# Altium PCB PCB1.PcbDoc
Units mm, origin at the board's own origin, x right, y up, seen from the top; angles counter-clockwise.
Board outline 51 x 51 mm, 2 copper layers (Top Layer, Bottom Layer), stack 1.57 mm thick; 77 components, 49 nets, 304 pads, 1 vias.
Unrouted connection lines stored in the file: 196.
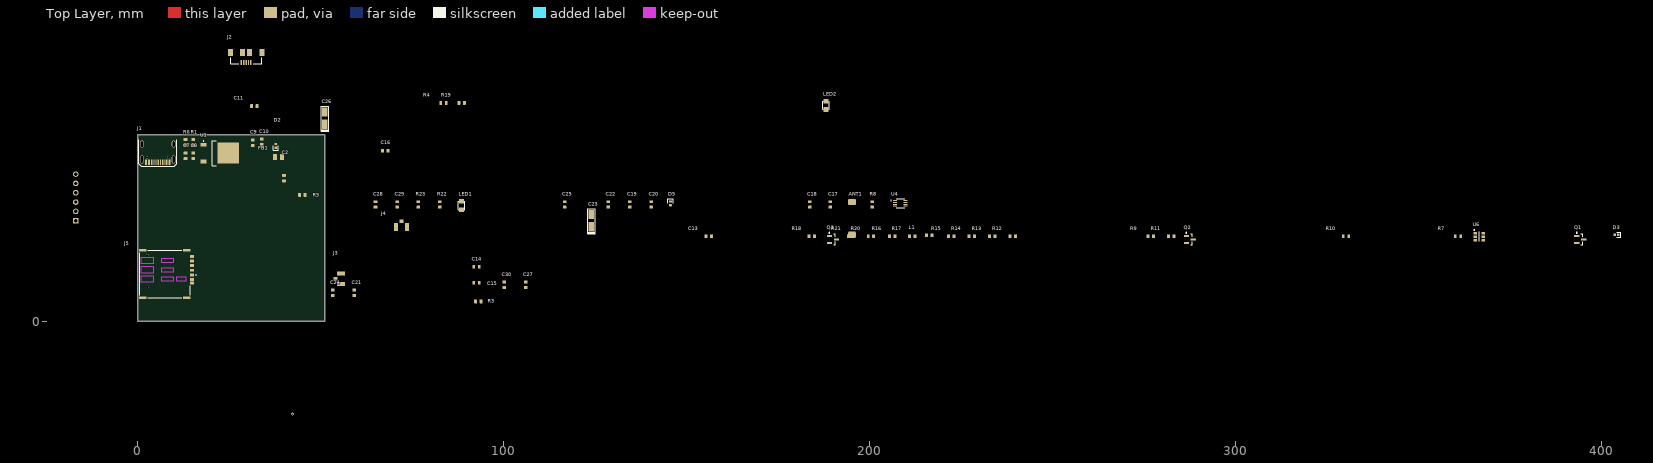
[diagram p0: Top Layer view]
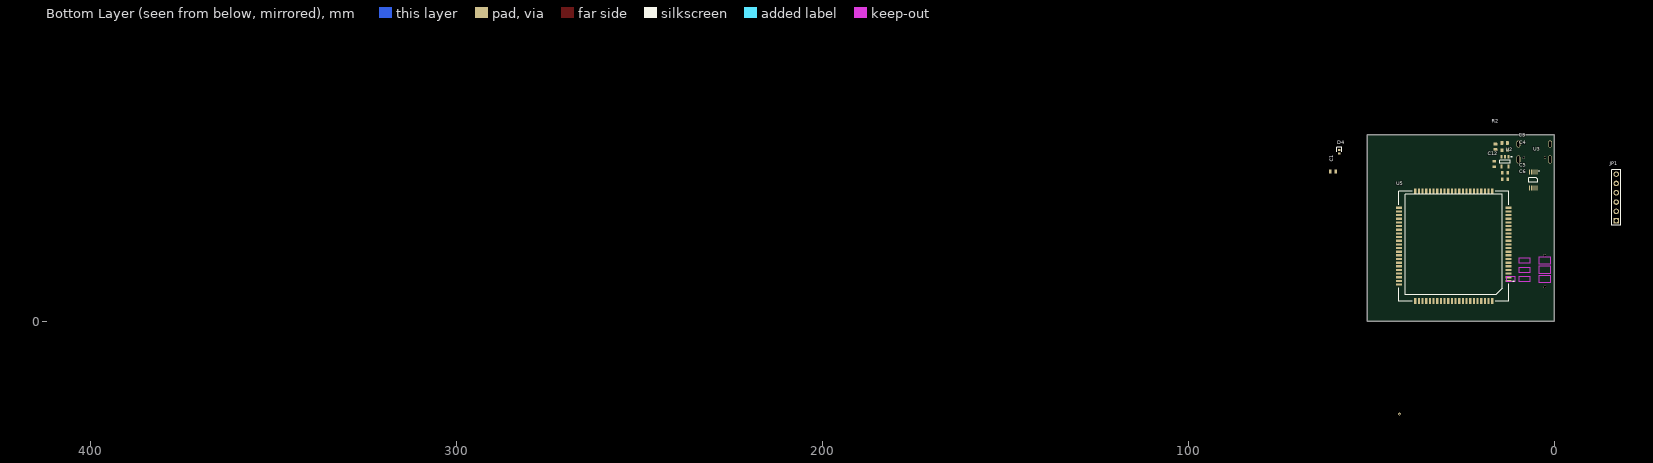
[diagram p1: Bottom Layer view, seen from below]

## Layer stack, top to bottom
Top Solder: solder mask 0.02, Solder Resist, Dk 3.5
Top Layer: signal copper 0.035
Dielectric 1: dielectric 1.5, FR-4, Dk 4.8
Bottom Layer: signal copper 0.035
Bottom Solder: solder mask 0.02, Solder Resist, Dk 3.5

## Board outline
0,0 51,0 51,51 0,51

## Design rules (kind name [scope] priority, off if disabled: settings)
AssemblyTestPointUsage [All] p1: valid=2
AssemblyTestpoint [All] p1: testpointundercomponent=TRUE minsize=1.016 maxsize=2.54 preferedsize=1.524 minholesize=0 maxholesize=1.016 preferedholesize=0.813 testpointgrid=0.025 usegrid=FALSE gridtolerance=0 allowsidetop=TRUE allowsidebottom=TRUE
BoardOutlineClearance [All] p1: gap=0.254 ignorepadtopadclearanceinfootprint=FALSE except(0: Arc-SplitContinuation Track-SplitContinuation SMDPad-SplitContinuation THPad-SplitContinuation Via-SplitContinuation Fill-SplitContinuation Poly-SplitContinuation Region-SplitContinuation Text-SplitContinuation)
Clearance BREAKOUT [WithinRoom('CPU_10')or WithinRoom('CPU_11')or WithinRoom('CPU_12')or WithinRoom('CPU_13')or WithinRoom('CPU_15')or WithinRoom('CPU_16') or WithinRoom('CPU_17')or WithinRoom('CPU_4')or WithinRoom('CPU_7')or WithinRoom('CPU_8') or WithinRoom('CPU_9') or WithinRoom('CPU_3')or WithinRoom('CPU_5')or WithinRoom('CPU1')or WithinRoom('CPU2')] p1: gap=0.076 ignorepadtopadclearanceinfootprint=TRUE except(0.08: SMDPad-Fill SMDPad-Text SMDPad-Hole; 0.102: SMDPad-SMDPad SMDPad-THPad THPad-THPad; 0.114: Arc-Poly Track-SMDPad Track-THPad Track-Fill Track-Poly SMDPad-Via SMDPad-Poly SMDPad-Region THPad-Via THPad-Fill THPad-Poly THPad-Region THPad-Text THPad-Hole Via-Via Via-Region Fill-Poly Poly-Poly Poly-Region Poly-Text Poly-Hole; 0.117: Via-Fill Via-Poly)
Clearance GND_SGND [InNet('ETH1_GND')OR InNet('ETH2_GND') OR InNet('ETH3_GND')OR InNet('ETH4_GND') or InNet('RT_ETH_GND') vs InNet('GND')] p2: gap=0.6 ignorepadtopadclearanceinfootprint=TRUE
Clearance 50Ohm_GND_INNER [OnMid and (InNetClass('50SE') OR InNetClass('RGMII_50SE') OR InNetClass('SDCARD_50ohm')) vs InNet('GND')] p3: gap=0.102 ignorepadtopadclearanceinfootprint=TRUE
Clearance PCIe_85_GND_INNER [InNetClass('PCIE') And  OnMid vs InNet('GND')] p4: gap=0.152 ignorepadtopadclearanceinfootprint=TRUE
Clearance USB_90_GND_INNER [(InNetClass('USB_HS') OR InNetClass('USB_SS')) And  OnMid vs InNet('GND')] p5: gap=0.178 ignorepadtopadclearanceinfootprint=TRUE
Clearance ETH100_GND_INNER [OnMid and InNetClass('Ethernet') vs InNet('GND') or InNet('ETH1_GND')  or InNet('ETH2_GND') or InNet('ETH3_GND') or InNet('ETH4_GND') or InNet('RT_ETH_GND')] p6: gap=0.203 ignorepadtopadclearanceinfootprint=TRUE
Clearance 50Ohm_GND [InNetClass('50SE') OR InNetClass('RGMII_50SE') OR InNetClass('SDCARD_50ohm') vs InNet('GND')] p7: gap=0.127 ignorepadtopadclearanceinfootprint=TRUE
Clearance PCIe_85_GND [InNetClass('PCIE') vs InNet('GND')] p8: gap=0.203 ignorepadtopadclearanceinfootprint=TRUE
Clearance USB_90_GND [InNetClass('USB_HS') OR InNetClass('USB_SS') vs InNet('GND')] p9: gap=0.203 ignorepadtopadclearanceinfootprint=TRUE
Clearance ETH100_GND [InNetClass('Ethernet') vs InNet('GND') or InNet('ETH1_GND')  or InNet('ETH2_GND') or InNet('ETH3_GND') or InNet('ETH4_GND') or InNet('RT_ETH_GND')] p10: gap=0.203 ignorepadtopadclearanceinfootprint=FALSE
Clearance 50Ohm_OTHER_INNER [OnMid and (InNetClass('50SE') OR InNetClass('RGMII_50SE') OR InNetClass('SDCARD_50ohm'))] p11: gap=0.203 ignorepadtopadclearanceinfootprint=TRUE
Clearance PCIe_85_PCIe_85_INNER [InNetClass('PCIE') And  OnMid] p12: gap=0.239 ignorepadtopadclearanceinfootprint=TRUE
Clearance PCIe_85_OTHER_INNER [InNetClass('PCIE') And  OnMid vs Not InNetClass('PCIE')] p13: gap=0.239 ignorepadtopadclearanceinfootprint=TRUE
Clearance USB_90_USB90_INNER [(InNetClass('USB_HS') OR InNetClass('USB_SS')) And  OnMid] p14: gap=0.203 ignorepadtopadclearanceinfootprint=TRUE
Clearance USB_90_OTHER_INNER [(InNetClass('USB_HS') OR InNetClass('USB_SS')) And  OnMid vs Not (InNetClass('USB_HS') OR InNetClass('USB_SS'))] p15: gap=0.203 ignorepadtopadclearanceinfootprint=TRUE
Clearance ETH100_ETH100_INNER [InNetClass('Ethernet') And  OnMid] p16: gap=0.386 ignorepadtopadclearanceinfootprint=TRUE
Clearance ETH100_OTHER_INNER [InNetClass('Ethernet') And  OnMid vs Not InNetClass('Ethernet')] p17: gap=0.386 ignorepadtopadclearanceinfootprint=TRUE
Clearance 50Ohm_OTHER [InNetClass('50SE') OR InNetClass('RGMII_50SE') OR InNetClass('SDCARD_50ohm')] p18: gap=0.345 ignorepadtopadclearanceinfootprint=TRUE
Clearance PCIe_PCIe_85 [InNetClass('PCIE')] p19: gap=0.406 ignorepadtopadclearanceinfootprint=TRUE
Clearance PCIe_85_OTHER [InNetClass('PCIE') vs Not InNetClass('PCIE')] p20: gap=0.406 ignorepadtopadclearanceinfootprint=TRUE
Clearance USB_90_USB90 [InNetClass('USB_HS') OR InNetClass('USB_SS')] p21: gap=0.356 ignorepadtopadclearanceinfootprint=TRUE
Clearance USB_90_OTHER [InNetClass('USB_HS') OR InNetClass('USB_SS') vs Not (InNetClass('USB_HS') OR InNetClass('USB_SS'))] p22: gap=0.356 ignorepadtopadclearanceinfootprint=TRUE
Clearance ETH100_ETH100 [InNetClass('Ethernet')] p23: gap=0.559 ignorepadtopadclearanceinfootprint=TRUE
Clearance ETH100_OTHER [InNetClass('Ethernet') vs Not InNetClass('Ethernet')] p24: gap=0.559 ignorepadtopadclearanceinfootprint=TRUE
Clearance Default [All] p25: gap=0.254 ignorepadtopadclearanceinfootprint=TRUE except(0.279: Region-Region)
ComponentClearance [All] p1: gap=0.3 collisioncheckmode=3 verticalgap=0 showdistances=FALSE donotcheckwithout3dbody=TRUE checkcomponentboundary=TRUE
DiffPairsRouting BREAKOUT_2 [WithinRoom('CPU') or WithinRoom('CPU_1') or WithinRoom('CPU_2') or WithinRoom('CPU_4')or WithinRoom('CPU_6')or WithinRoom('CPU_7')or WithinRoom('CPU_8')or WithinRoom('CPU_9')or WithinRoom('CPU_10')or WithinRoom('CPU_11')or WithinRoom('CPU_12')or WithinRoom('CPU_13')or WithinRoom('CPU_14')or WithinRoom('CPU_15')or WithinRoom('CPU_16')] p1: maxlimit=0.076 minlimit=0.076 mostfreqgap=0.076 toplayer_minwidth=0.076 toplayer_maxwidth=0.203 toplayer_prefwidth=0.076 bottomlayer_minwidth=0.076 bottomlayer_maxwidth=0.203 bottomlayer_prefwidth=0.076 maxuncoupledlength=12.7
DiffPairsRouting 100_OHM_DIFF [InDifferentialPairClass('ETH0_100Diff')] p2: maxlimit=0.152 minlimit=0.152 mostfreqgap=0.152 toplayer_minwidth=0.14 toplayer_maxwidth=0.14 toplayer_prefwidth=0.14 bottomlayer_minwidth=0.14 bottomlayer_maxwidth=0.14 bottomlayer_prefwidth=0.14 maxuncoupledlength=12.7
DiffPairsRouting 90_OHM_DIFF [InDifferentialPairClass('USB_HS_90diff') OR InDifferentialPairClass('USB_sS_90diff')] p3: maxlimit=0.152 minlimit=0.152 mostfreqgap=0.152 toplayer_minwidth=0.178 toplayer_maxwidth=0.178 toplayer_prefwidth=0.178 bottomlayer_minwidth=0.178 bottomlayer_maxwidth=0.178 bottomlayer_prefwidth=0.178 maxuncoupledlength=12.7
DiffPairsRouting 85_OHM_DIFF [InDifferentialPairClass('PCIE_85Diff')] p4: maxlimit=0.152 minlimit=0.152 mostfreqgap=0.152 toplayer_minwidth=0.203 toplayer_maxwidth=0.203 toplayer_prefwidth=0.203 bottomlayer_minwidth=0.203 bottomlayer_maxwidth=0.203 bottomlayer_prefwidth=0.203 maxuncoupledlength=12.7
FabricationTestPointUsage [All] p1: valid=2 allowmultiple=FALSE
FabricationTestpoint [All] p1: side=3 testpointundercomponent=TRUE minsize=0.762 maxsize=2.54 preferedsize=1.524 minholesize=0 maxholesize=1.016 preferedholesize=0.813 testpointgrid=0.025 allowsidetop=TRUE allowsidebottom=TRUE usegrid=FALSE gridtolerance=0
MatchedLengths DiffPair_MatchedLengths [(InNetClass('DDR_100_OHM') or InNetClass('USB2D0') or InNetClass('USBWIFI'))] p1: tolerance=0.3 checknetsindiffpair=TRUE checkdiffpairvsdiffpair=FALSE checkxsignals=FALSE checkothers=FALSE
MinimumSolderMaskSliver [All] p1: minsoldermaskwidth=0.08
PlaneConnect [All] p1: planeconnectstyle=Direct reliefexpansion=0.508 reliefentries=4 reliefconductorwidth=0.254 reliefairgap=0.254
PolygonConnect PolygonConnect_1 [IsNamedPolygon('+12V') OR IsNamedPolygon('VCC')] p1: thpad.connectstyle=Relief thpad.reliefconductorwidth=0.8 thpad.reliefentries=4 thpad.polygonreliefangle="90 Angle" thpad.airgapwidth=0.3 smdpad.connectstyle=Relief smdpad.reliefconductorwidth=0.8 smdpad.reliefentries=4 smdpad.polygonreliefangle="90 Angle" smdpad.airgapwidth=0.3 via.connectstyle=Direct via.reliefconductorwidth=0.8 via.reliefentries=4 via.polygonreliefangle="90 Angle" via.airgapwidth=0.3
PolygonConnect [IsNamedPolygon('GND')] p2: connectstyle=Direct reliefconductorwidth=0.254 reliefentries=4 polygonreliefangle="90 Angle" airgapwidth=0.254
RoutingVias [All] p1: holewidth=0.711 width=1.27 viastyle="Through Hole" minholewidth=0.711 minwidth=1.27 maxholewidth=0.711 maxwidth=1.27 useviatemplates=TRUE viatemplateguid#1={6FAFDE06-7B93-419E-838A-A36D30FBA691} viatemplatename#1=v80h40m0mx0
RoutingVias Via550 [All] p2: holewidth=0.25 width=0.55 viastyle="Through Hole" minholewidth=0.25 minwidth=0.55 maxholewidth=0.25 maxwidth=0.55
SilkToSilkClearance [All] p1: silktosilkclearance=0.2
SilkToSolderMaskClearance [IsPad] p1: minsilkscreentomaskgap=0.01 clearancetoexposedcopper=TRUE
SolderMaskExpansion [IsVia] p1: expansion=0.1 istentingtop=TRUE soldermaskfromhole=TRUE
ViasUnderSMD [All] p1: allowed=FALSE
Width BREAKOUT_1 [WithinRoom('CPU') or WithinRoom('CPU_1') or WithinRoom('CPU_2') or WithinRoom('CPU_3') or WithinRoom('CPU_4') or WithinRoom('CPU_5')or WithinRoom('CPU_6')or WithinRoom('CPU_7')or WithinRoom('CPU_8')or WithinRoom('CPU_9')or WithinRoom('CPU_10')or WithinRoom('CPU_11')or WithinRoom('CPU_12')or WithinRoom('CPU_13')or WithinRoom('CPU_14')or WithinRoom('CPU_15')or WithinRoom('CPU_16')] p1: maxlimit=0.6 minlimit=0.089 preferedwidth=0.15 minimp=50.000000 maximp=50.000000 favimp=50.000000
Width 50_OHM [(InNetClass('50SE') Or InNetClass('RGMII_50SE') or InNetClass('SDCARD_50ohm'))] p2: maxlimit=0.2 minlimit=0.076 preferedwidth=0.173 bottomlayer_maxwidth=0.173 minimp=50.000000 maximp=50.000000 favimp=50.000000
Width [All] p3: maxlimit=10 minlimit=0.254 preferedwidth=0.254
20 further rules are at their usual default settings.

## Components (designator, comment, footprint, x,y, rotation, side; value= is the part's Value field where it differs from the comment)
ANT1 "ANT MAIN" AMCA92-2R660G-S1F-T 195.1,28.1 r90 top
C1 "100nF" CAP_0603 60.4,40.9 r180 bottom
C2 "100nF" CAP_0603 39.9,39.1 r270 top
C3 "10uF" CAP_0603 13.5,48.7 r0 bottom
C4 "1uF" CAP_0603 13.45,46.7 r0 bottom
C5 "1uF" CAP_0603 13.4,40.6 r0 bottom
C6 "100nF" CAP_0603 13.4,38.8 r0 bottom
C7 "10uF" CAP_0603 13,45.2 r90 top
C8 "0.1uF" CAP_0603 15.1,45.2 r90 top
C9 "22pF" CAP_0603 31.4,48.8 r90 top
C10 "0.1uF" CAP_0603 33.8,49 r90 top
C11 "1uF" CAP_0603 31.8,58.8 r0 top
C12 "22nF" CAP_0603 16.3,42.95 r90 bottom
C13 "100nF" CAP_0603 155.956,23.241 r0 top
C14 "100nF" CAP_0603 92.5,14.9 r180 top
C15 "33pF" CAP_0603 92.5,10.5 r0 top
C16 "C0603" CAP_0603 67.6,46.6 r180 top
C17 "22pF" CAP_0603 189.2,31.9 r90 top
C18 "C0603" CAP_0603 183.6,31.9 r90 top
C19 "C0603" CAP_0603 134.4,31.9 r90 top
C20 "C0603" CAP_0603 140.2,31.9 r90 top
C21 "1uF" CAP_0603 59.1,7.8 r90 top
C22 "100nF" CAP_0603 128.5,31.9 r90 top
C23 "100uF/10V" "tu tantalum smd3216" 123.9,27.5 r90 top
C24 "1uF" CAP_0603 53.2,7.8 r90 top
C25 "100nF" CAP_0603 116.6,31.9 r90 top
C26 "100uF/10V" "tu tantalum smd3216" 51.1,55.5 r90 top
C27 "22pF" CAP_0603 106,10 r90 top
C28 "22pF" CAP_0603 64.9,31.9 r90 top
C29 "22pF" CAP_0603 70.8,31.9 r90 top
C30 "100uF" CAP_0603 100.1,10 r90 top
D2 "D_TVS_0402" D_0402 37.6,47.9 r270 top
D3 "D_TVS_0402" D_0402 403.987,23.622 r0 top
D4 "D_TVS_0402" D_0402 58.7,46.3 r90 bottom
D5 "D_TVS_0402" D_0402 145.5,32.2 r90 top
FB1 "FB0805" FB_0805 38.4,44.9 r0 top
J1 "TYPE-C-31-M-12" TYPE-C-31-M-12 5.4,46.3 r180 top
J2 "USB3100-30-A" USB3100-30-A 29.55,72.787 r180 top
J3 "U.FL-R-SMT-1(60)" U.FL-R-SMT-1(60) 55.5,11.6 r270 top
J4 "U.FL-R-SMT-1(60)" U.FL-R-SMT-1(60) 72,25.8 r180 top
J5 "SIM8066-6-1-14-01-A_REVA" GCT_SIM8066-6-1-14-01-A_REVA 7.4,12.9 r270 top
JP1 "JP 1x6 2.54" HDR1X6 -17,27.48 r90 bottom
L1 "47nH" IND_0603 216.154,23.495 r0 top
LED1 "red" LED-0805-Red 88.4,30.5 r90 top
LED2 "red" LED-0805-Red 187.998,57.863 r90 top
Q1 "NPN-SOT23" "SOT23 - 3PIN" 394.081,22.352 r0 top
Q2 "NPN-SOT23" "SOT23 - 3PIN" 287.401,22.352 r0 top
Q3 "NPN-SOT23" "SOT23 - 3PIN" 189.865,22.352 r0 top
R1 "10K" RES_0603 15.1,48.9 r90 top
R2 "10K" RES_0603 16,47.65 r270 bottom
R3 "0" RES_0603 93,5.4 r180 top
R4 "0" RES_0603 83.477,59.641 r0 top
R5 "4.7K" RES_0603 44.9,34.5 r180 top
R6 "4.7K" RES_0603 13,48.9 r90 top
R7 "10K" RES_0603 360.68,23.241 r0 top
R8 "10R" RES_0603 200.6,31.9 r90 top
R9 "0" RES_0603 276.733,23.241 r0 top
R10 "0" RES_0603 330.073,23.241 r0 top
R11 "0" RES_0603 282.321,23.241 r0 top
R12 "1K" RES_0603 239.014,23.241 r0 top
R13 "1K" RES_0603 233.426,23.241 r0 top
R14 "10K" RES_0603 227.838,23.241 r0 top
R15 "10K" RES_0603 222.25,23.241 r0 top
R16 "10K" RES_0603 206.121,23.241 r0 top
R17 "1K" RES_0603 211.582,23.241 r0 top
R18 "10K" RES_0603 184.15,23.241 r0 top
R19 "22R" RES_0603 88.43,59.641 r0 top
R20 "22R" RES_0603 200.279,23.241 r0 top
R21 "470R" RES_0603 194.945,23.241 r0 top
R22 "22R" RES_0603 82.5,31.9 r90 top
R23 "470R" RES_0603 76.6,31.9 r90 top
U1 "AZ1084CD-ADJTRG1" "TO252 DPAK" 22.35,45.92 r0 top
U2 "RT9193-ADJ" SOT-23-5 13.4,43.6 r270 bottom
U3 "CH340E" MSOP-10 5.7,38.6 r270 bottom
U4 "TXB0102DCUR" txb0102 208.3,32.2 r0 top
U5 "SIM760x" "SIM7600CE - duplicate" 27.4,20.5 r0 bottom
U6 "TPD4E001" TSOT-26-6 366.522,23.114 r0 top

## Footprints (in the part's own frame and the unit in brackets; to place one, negate y for a bottom-side part, rotate by r counter-clockwise, add the part's x,y. Pads: shape width x height; smd on the part's side, far side on the other; paste and mask are expansions set on the pad)
AMCA92-2R660G-S1F-T [mm]
  rrect50% 1.7x2.2 smd: 1(-4.45,0) 2(4.45,0)
  body extent -4,-0.5 4,0.5, height 1
CAP_0603 [mm]
  rrect25% 0.8x1 smd: 1(-0.75,0) 2(0.75,0)
  body extent -0.8,-0.4 0.8,0.4, height 0.51
D_0402 [mm]
  rrect25% 0.6x0.7 smd: A(-0.5,0) K(0.5,0)
  silkscreen extent 0,-0.7 1.2,0.7, body extent -0.5,-0.25 0.5,0.25, height 0.51
FB_0805 [mm]
  rrect25% 1x1.7 smd: 1(-0.95,0) 2(0.95,0)
  body extent -1,-0.63 1,0.63, height 0.86
GCT_SIM8066-6-1-14-01-A_REVA [mm]
  rect 0.8x1.14 smd: C1(0.25,7.37) C2(-2.29,7.37) C3(-4.83,7.37) C5(1.52,7.37) C6(-1.02,7.37) C7(-3.56,7.37) CD(2.47,7.37)
  rect 0.7x2.1 smd: G1(-6.5,5.89) G2(6.5,5.89) G3(-6.5,-6.11) G4(6.5,-6.11)
  round 0.75 hole 0.75 unplated: ""(-5,-4.86) ""(3.5,-4.86)
  Keep-Out Layer region: 2,3.135 0.8,3.135 0.8,5.685 2,5.685
  Keep-Out Layer region: -0.255,-6.56 -2.105,-6.56 -2.105,-3.16 -0.255,-3.16
  Keep-Out Layer region: -2.795,-6.56 -4.645,-6.56 -4.645,-3.16 -2.795,-3.16
  Keep-Out Layer region: 2.285,-6.56 0.435,-6.56 0.435,-3.16 2.285,-3.16
  Keep-Out Layer region: 2,-0.915 0.8,-0.915 0.8,2.295 2,2.295
  Keep-Out Layer region: -0.54,-0.915 -1.74,-0.915 -1.74,2.295 -0.54,2.295
  Keep-Out Layer region: -3.08,-0.915 -4.28,-0.915 -4.28,2.295 -3.08,2.295
  silkscreen extent -6.55,-6.86 6.55,8.59, body extent -6.6,-7.09 6.49,7.47, height 1.5
HDR1X6 [mm] "Connector; Header; 6 Position"
  rect 1.5x1.5 hole 0.9: 1(0,0)
  round 1.5 hole 0.9: 2(2.54,0) 3(5.08,0) 4(7.62,0) 5(10.16,0) 6(12.7,0)
  silkscreen extent -1.27,-1.27 13.97,1.27, body extent -1.27,-1.27 13.97,1.27, height 7
IND_0603 [mm]
  rrect25% 0.8x1 smd: 1(-0.75,0) 2(0.75,0)
  body extent -0.81,-0.37 0.81,0.37, height 0.87
LED-0805-Red [mil]
  rect 50x55 smd: 1(0,0) 2(90,0)
  silkscreen extent 0,-35 90,35, body extent 5,-25 85,25, height 43
MSOP-10 [mm]
  rrect25% 1.4x0.3 smd mask+0.05: 1(-2.2,1) 2(-2.2,0.5) 3(-2.2,0) 4(-2.2,-0.5) 5(-2.2,-1) 6(2.2,-1) 7(2.2,-0.5) 8(2.2,0) 9(2.2,0.5) 10(2.2,1)
  silkscreen extent -2.57,-1.25 0.67,1.7, body extent -2.45,-1.5 2.45,1.5, height 1.15
RES_0603 [mm]
  rrect25% 0.8x1 smd: 1(-0.75,0) 2(0.75,0)
  body extent -0.8,-0.43 0.8,0.43, height 0.52
"SIM7600CE - duplicate" [mm]
  rect 1.6x0.6 smd: 1(-15,9.5) 2(-15,8.5) 3(-15,7.5) 4(-15,6.5) 5(-15,5.5) 6(-15,4.5) 7(-15,3.5) 8(-15,2.5) 9(-15,1.5) 10(-15,0.5) 11(-15,-0.5) 12(-15,-1.5) 13(-15,-2.5) 14(-15,-3.5) 15(-15,-4.5) 16(-15,-5.5) 17(-15,-6.5) 18(-15,-7.5) 19(-15,-8.5) 20(-15,-9.5) 41(15,-9.5) 42(15,-8.5) 43(15,-7.5) 44(15,-6.5) 45(15,-5.5) 46(15,-4.5) 47(15,-3.5) 48(15,-2.5) 49(15,-1.5) 50(15,-0.5) 51(15,0.5) 52(15,1.5) 53(15,2.5) 54(15,3.5) 55(15,4.5) 56(15,5.5) 57(15,6.5) 58(15,7.5) 59(15,8.5) 60(15,9.5) 81(-15,-10.5) 82(15,-10.5) 85(15,10.5)
  rect 0.6x1.6 smd: 21(-9.5,-15) 22(-8.5,-15) 23(-7.5,-15) 24(-6.5,-15) 25(-5.5,-15) 26(-4.5,-15) 27(-3.5,-15) 28(-2.5,-15) 29(-1.5,-15) 30(-0.5,-15) 31(0.5,-15) 32(1.5,-15) 33(2.5,-15) 34(3.5,-15) 35(4.5,-15) 36(5.5,-15) 37(6.5,-15) 38(7.5,-15) 39(8.5,-15) 40(9.5,-15) 61(9.5,15) 62(8.5,15) 63(7.5,15) 64(6.5,15) 65(5.5,15) 66(4.5,15) 67(3.5,15) 68(2.5,15) 69(1.5,15) 70(0.5,15) 71(-0.5,15) 72(-1.5,15) 73(-2.5,15) 74(-3.5,15) 75(-4.5,15) 76(-5.5,15) 77(-6.5,15) 78(-7.5,15) 79(-8.5,15) 80(-9.5,15) 83(10.5,-15) 84(-10.5,-15) 86(-10.5,15) 87(10.5,15)
  silkscreen extent -16.43,-15 15,15, body extent -15,-15.01 15.02,15.01, height 2.82
"SOT23 - 3PIN" [mm]
  rect 1.4x0.6 smd: 1(-0.95,0.95) 2(-0.95,-0.95) 3(0.95,0)
  silkscreen extent -1.07,-1.5 0.7,1.92, body extent -1.4,-1.45 1.4,1.45, height 1.29
SOT-23-5 [mm] "SOT23, 5-Leads, Body 2,90x2,80mm, Pitch 0,95mm, IPC Medium Density"
  rrect25% 1.05x0.6 smd: 1(-1.325,0.95) 2(-1.325,0) 3(-1.325,-0.95) 4(1.325,-0.95) 5(1.325,0.95)
  silkscreen extent -1.45,-1.45 0.4,1.92, body extent -1.4,-1.45 1.4,1.45, height 1.45
"TO252 DPAK" [mm] "D-PAK, 3-Pads, Body 6.3x6.8mm (max), IPC Medium Density"
  rect 1.6x1 smd: 1(-4.45,2.28) 3(-4.45,-2.28)
  rect 5.9x5.7 smd: 2(2.35,0)
  silkscreen extent -4.57,-3.4 -1,3.45, body extent -4.71,-3.29 4.99,3.29, height 2.3
TSOT-26-6 [mm] "TSOP, 6-Leads, Body 2.90x1.60mm, Pitch 0.95mm, IPC Medium Density"
  rrect25% 1x0.7 smd: 1(-1.1,0.95) 2(-1.1,0) 3(-1.1,-0.95) 4(1.1,-0.95) 5(1.1,0) 6(1.1,0.95)
  silkscreen extent -1.47,-1.3 0,1.92, body extent -1.4,-1.55 1.4,1.55, height 1
"tu tantalum smd3216" [mm]
  rect 2.5x1.5 smd: 1(-1.7,0) 2(1.7,0)
  silkscreen extent -3.61,-1 3.17,1, body extent -1.7,-0.9 1.7,0.9, height 1.69
txb0102 [mm]
  rrect25% 1.12x0.27 smd: 1(-1.405,0.75) 2(-1.405,0.25) 3(-1.405,-0.25) 4(-1.405,-0.75) 5(1.405,-0.75) 6(1.405,-0.25) 7(1.405,0.25) 8(1.405,0.75)
  silkscreen extent -2.62,-1.2 1.15,1.2, body extent -1.55,-1.02 1.55,0.98, height 0.9
TYPE-C-31-M-12 [mm]
  rect 0.6x1.5 smd mask+0.07: A1B12(-3.2,2.85) B1A12(3.2,2.85)
  rect 0.6x1.5 smd mask+0.14: A4B9(-2.4,2.85) B4A9(2.4,2.85)
  rect 0.3x1.5 smd mask+0.14: A5(-1.25,2.85) A6(-0.25,2.85) A7(0.25,2.85) A8(1.25,2.85) B5(1.75,2.85) B6(0.75,2.85) B7(-0.75,2.85) B8(-1.75,2.85)
  round 0.6 hole 0.6 unplated mask+0.3: MH(-2.9,1.6) MH(2.9,1.6)
  oval 1x1.9 hole 0.55 slot 1.45 at 90 deg mask+0.05: SH(-4.325,-2.1) SH(4.325,-2.1)
  oval 1x2.2 hole 0.55 slot 1.75 at 90 deg mask+0.05: SH(-4.325,2.1) SH(4.325,2.1)
  silkscreen extent -5.25,-3.25 5.25,4, body extent -4.47,-4.65 4.47,3.25, height 3.32
U.FL-R-SMT-1(60) [mm]
  rect 1x1.05 smd mask+0.07: 1(0,-1.512)
  rect 1.05x2.2 smd mask+0.07: 2(-1.475,0.013) 2(1.475,0.013)
  body extent -1.5,-1.55 1.5,1.55, height 1.26
USB3100-30-A [mm]
  rect 0.4x1.35 smd mask+0.15: 1(1.3,2.063) 2(0.65,2.063) 3(0,2.063) 4(-0.65,2.063) 5(-1.3,2.063)
  rect 1.4x1.9 smd: SH(-4.3,-0.613) SH(4.3,-0.613)
  rect 1.4x1.9 smd mask+0.3: SH(-0.95,-0.613) SH(0.95,-0.613)
  silkscreen extent -4.25,0.75 4.25,2.5, body extent -4.61,-3.34 4.61,2.16, height 2.69

## Part data
ANT1: library part AMCA92-2R660G-S1F-T
C1 C2 C3 C4 C5 C6 C7 C8 C9 C10 C11 C12 C13 C14 C15 C16 C17 C18 C19 C20 C21 C22 C24 C25 C27 C28 C29 C30: library part CAP_0603, "Capacitor SMD 0603"
C23 C26: library part "CAP 477C", "Tụ tantalum 7343 477C 16V 470uF 7.3x4.3mm"
D2 D3 D4 D5: "Diode TVS / ESD 0402"
FB1: library part FB_0805, "Ferrite Bead SMD 0805"
J1: "USB Type C Connector Horizontal SMT", Manufacturer="Koren Hroparts", Manufacturer Part Number=TYPE-C-31-M-12
J2: "USB Connector Type Micro B 2.0 SMD Reverse Mount", Manufacturer=GCT, Manufacturer Part Number=USB3100-30-A
J3 J4: library part ANT-SMD, "RF Connector u.FL 50 Ohms 6 GHz", Manufacturer="Hirose Connector", Manufacturer Part Number=U.FL-R-SMT-1(60)
J5: "Nano SIM Card ConnectorPush-Push Type, SMT, 6Pin, 1.44mm Profile", Package=None, Availability=Unavailable, MP=SIM8066-6-1-14-01-A_REVA, Price=None
JP1: library part "JP 1x6 2.54 Duc Thang", "Cắm", Chung_Loai=Cắm, Don_Vi=Con, Ma_Hang=MH000903, Ten_Linh_Kien="Jump Đơn Đực 2.54MM 1x40P Thẳng 11MM"
L1: library part IND_0603, "Inductor SMD 0603"
LED1 LED2: library part LED_0805_RED
R1 R2 R3 R4 R5 R6 R7 R8 R9 R10 R11 R12 R13 R14 R15 R16 R17 R18 R19 R20 R21 R22 R23: library part RES_0603, "Resistor SMD 0603"
U1: "Linear Voltage Regulator IC Positive Adjustable 1 Output 5A TO-252-3"
U2: library part RT9193, "Linear Voltage Regulator IC Positive Fixed 1 Output 300mA SOT-23-5"
U3: "USB-to-UART Transceiver MSOP-10", Manufacturer Part Number=CH340E
U4: "2-Bit Bidirectional Voltage-Level Shifter with Auto Direction Sensing and +/-15-kV ESD Protect 8-VSSOP -40 to 85", Package="VSSOP-8 Texas Instruments", Digi-Key_Part_Number=296-22862-1-ND, DigiKey-Purchase-URL=https://snapeda.com/shop?store=DigiKey&id=350005, MF="Texas Instruments", Mouser-Purchase-URL=https://snapeda.com/shop?store=Mouser&id=350005, MP=TXB0102DCUR, SnapEDA_Link=https://www.snapeda.com/parts/TXB0102DCUR/Texas%20Instruments/view-part/350005/?ref=snap, Texas_Instruments-Purchase-URL=https://snapeda.com/shop?store=Texas+Instruments&id=350005

## Via types
v1: diameter 0.8, hole 0.4, Top Layer to Bottom Layer, tented both sides, 1 vias

## Nets (pads, with @x,y where several pads share a name; then routed paths per layer and width w, separated by ;. In a path a pad name is that pad's centre, name@x,y a point inside that pad or via, vN(x,y) a via of type N, cw(c..) or ccw(c..) an arc to the next point about the centre after c; other vN are vias at no path point)
1V8: C14.1 R7.2 U4.3 U5.15
3V3: C1.1 C5.1 C6.1 C13.2 R17.2 U2.5 U3.10 U4.7
3V8: C21.1 C22.1 C23.1 C24.1 C25.1 C26.1 FB1.2 R8.2 U5.38 U5.39 U5.62 U5.63
5V: C2.2 C3.1 C4.1 C7.1 C8.1 J1.A4B9 J1.B4A9 J2.1 JP1.6 R2.1 R5.2 U1.3 U2.1 U3.7 U5.11
D+: J1.A6 J1.B6 U3.1
D-: J1.A7 J1.B7 U3.2
GND: C1.2 C2.1 C3.2 C4.2 C5.2 C6.2 C7.2 C8.2 C9.2 C10.2 C11.2 C12.2 C13.1 C14.2 C15.2 C16.1 C18.1 C19.1 C20.1 C21.2 C22.2 C23.2 C24.2 C25.2 C26.2 C27.1 C28.1 C29.1 C30.1 D2.A D3.A D4.A D5.A J1.A1B12 J1.B1A12 J1.SH J2.5 J2.SH J3.2 J4.2 J5.C5 J5.CD J5.G1 J5.G2 J5.G3 J5.G4 JP1.5 LED2.2 Q1.2 Q2.2 Q3.2 R6.1 R11.1 R14.2 R15.2 R16.1 U2.2 U3.3 U4.2 U5.1 U5.2 U5.5 U5.10 U5.14 U5.37 U5.40 U5.41 U5.43 U5.57 U5.58 U5.60 U5.61 U5.64 U5.65 U5.77 U5.78 U5.80 U5.81 U6.5
LED_STATUS: R21.1 U5.49
NetANT1_1: ANT1.1 C16.2 D4.K R10.1
NetC12_1: C12.1 U2.4
NetC15_1: C15.1 L1.1 R8.1
NetC17_1: C17.1 U5.79
NetC17_2: C17.2 D3.K J3.1 L1.2
NetC18_2: C18.2 R10.2 U5.59
NetC19_2: C19.2 D5.K J4.1 R9.2
NetC20_2: C20.2 R9.1 U5.82
NetC27_2: C27.2 R22.2 U5.19
NetC28_2: C28.2 R20.2 U5.18
NetC29_2: C29.2 R19.2 U5.17
NetC30_2: C30.2 J5.C1 R18.1 U5.20 U6.2
NetJ5_C2: J5.C2 R20.1 U6.4
NetJ5_C3: J5.C3 R22.1 U6.3
NetJ5_C7: J5.C7 R18.2 R19.1 U6.6
NetLED1_1: LED1.1 R17.1
NetLED1_2: LED1.2 Q3.3
NetLED2_1: LED2.1 R21.2
NETLIGHT: R23.1 U5.51
NetQ1_1: Q1.1 R12.2 R14.1
NetQ2_1: Q2.1 R13.2 R15.1
NetQ3_1: Q3.1 R23.2
NetR1_1: R1.1 R6.2 U1.1
NetR2_2: R2.2 U2.3
NetR3_1: R3.1 U3.8
NetR4_1: R4.1 U3.9
NetR5_1: R5.1 U3.4
NetR7_1: R7.1 U4.6
NetR16_2: R16.2 U5.85
POW: JP1.2 R12.1
RST: JP1.1 R13.1
SIM_POW: Q1.3 R11.2 U5.3
SIM_RST: Q2.3 U5.4
SIM_RX: U4.5 U5.68
SIM_TX: U4.4 U5.71
UART_RX: JP1.4 R3.2 U4.8
UART_TX: JP1.3 R4.2 U4.1
USB_D+: J2.3 U5.13
USB_D-: J2.2 U5.12
VBAT: C9.1 C10.1 C11.1 D2.K FB1.1 R1.2 U1.2
VDD_AUX: U5.44
pads on no net: ANT1.2 J1.A5 J1.A8 J1.B5 J1.B8 J1.MH J2.4 J5. J5.C6 U3.5 U3.6 U5.6 U5.7 U5.8 U5.9 U5.16 U5.21 U5.22 U5.23 U5.24 U5.25 U5.26 U5.27 U5.28 U5.29 U5.30 U5.31 U5.32 U5.33 U5.34 U5.35 U5.36 U5.42 U5.45 U5.46 U5.47 U5.48 U5.50 U5.52 U5.53 U5.54 U5.55 U5.56 U5.66 U5.67 U5.69 U5.70 U5.72 U5.73 U5.74 U5.75 U5.76 U5.83 U5.84 U5.86 U5.87 U6.1
copper on no net:
  other v1: 42.2,-25.4